# Altium PCB PCB.PcbDoc
Units mil, origin at the board's own origin, x right, y up, seen from the top; angles counter-clockwise.
Board outline 1500 x 2500 mil, 2 copper layers (Top Layer, Bottom Layer), stack 36.512 mil thick; 41 components, 27 nets, 114 pads, 89 vias.
Unrouted connection lines stored in the file: 2.
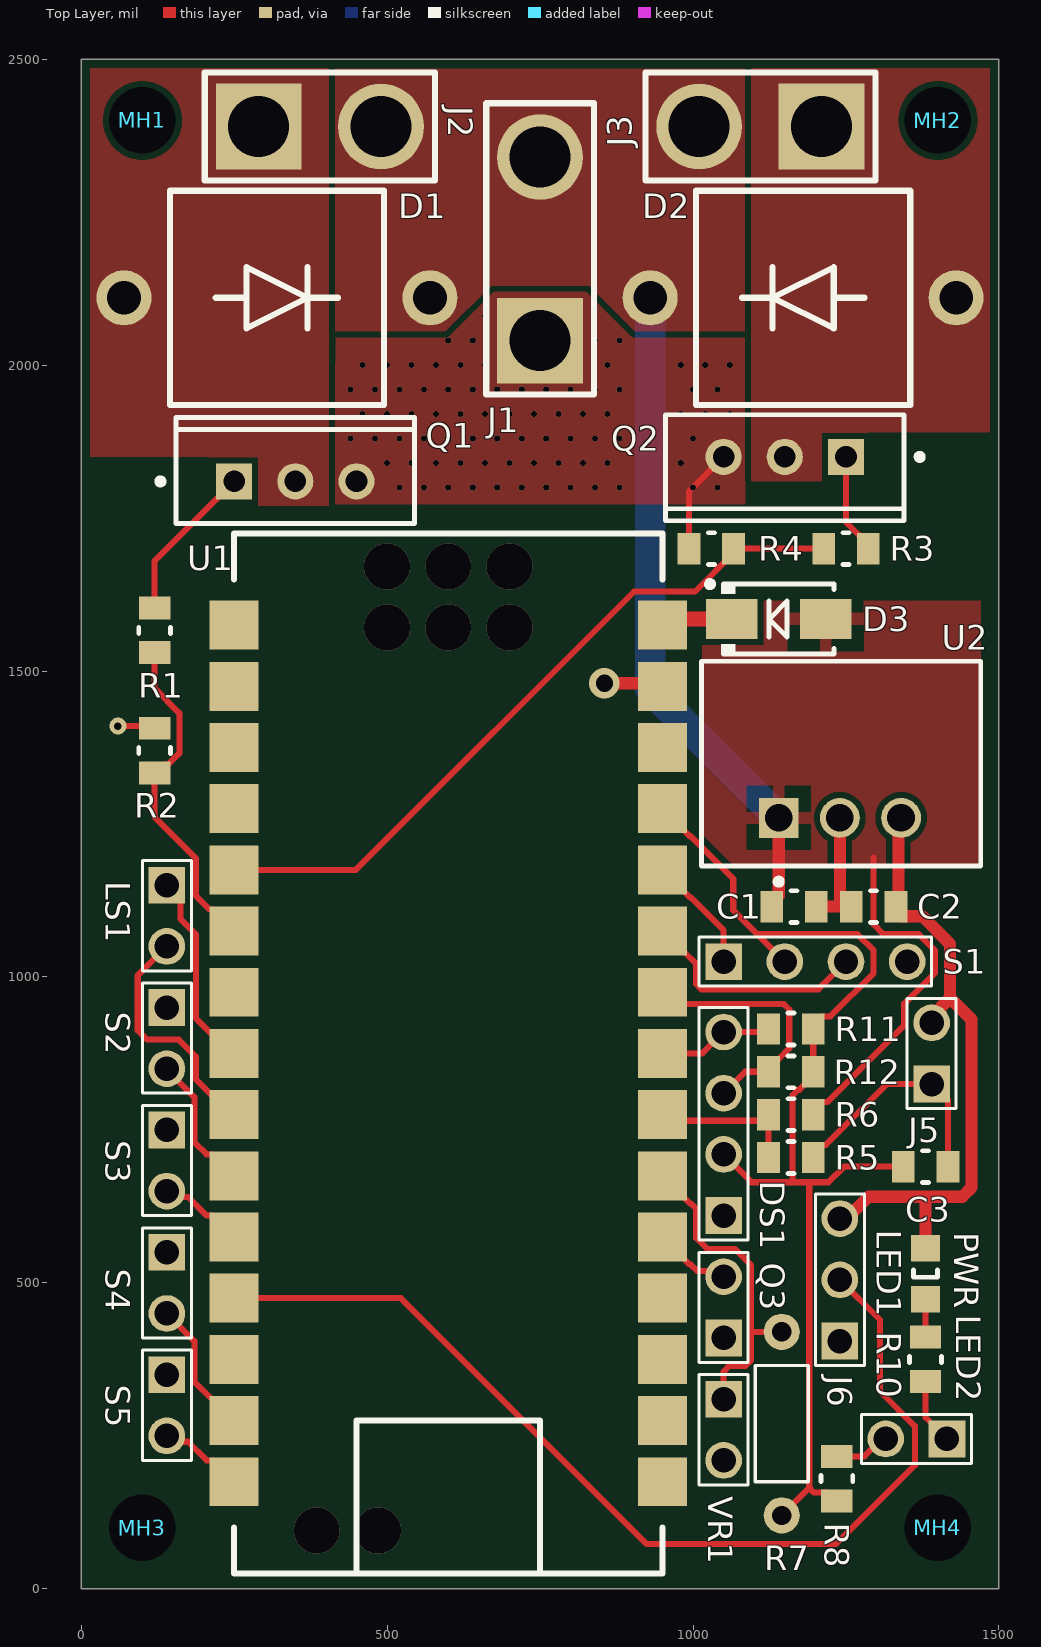
[diagram p0: Top Layer view]
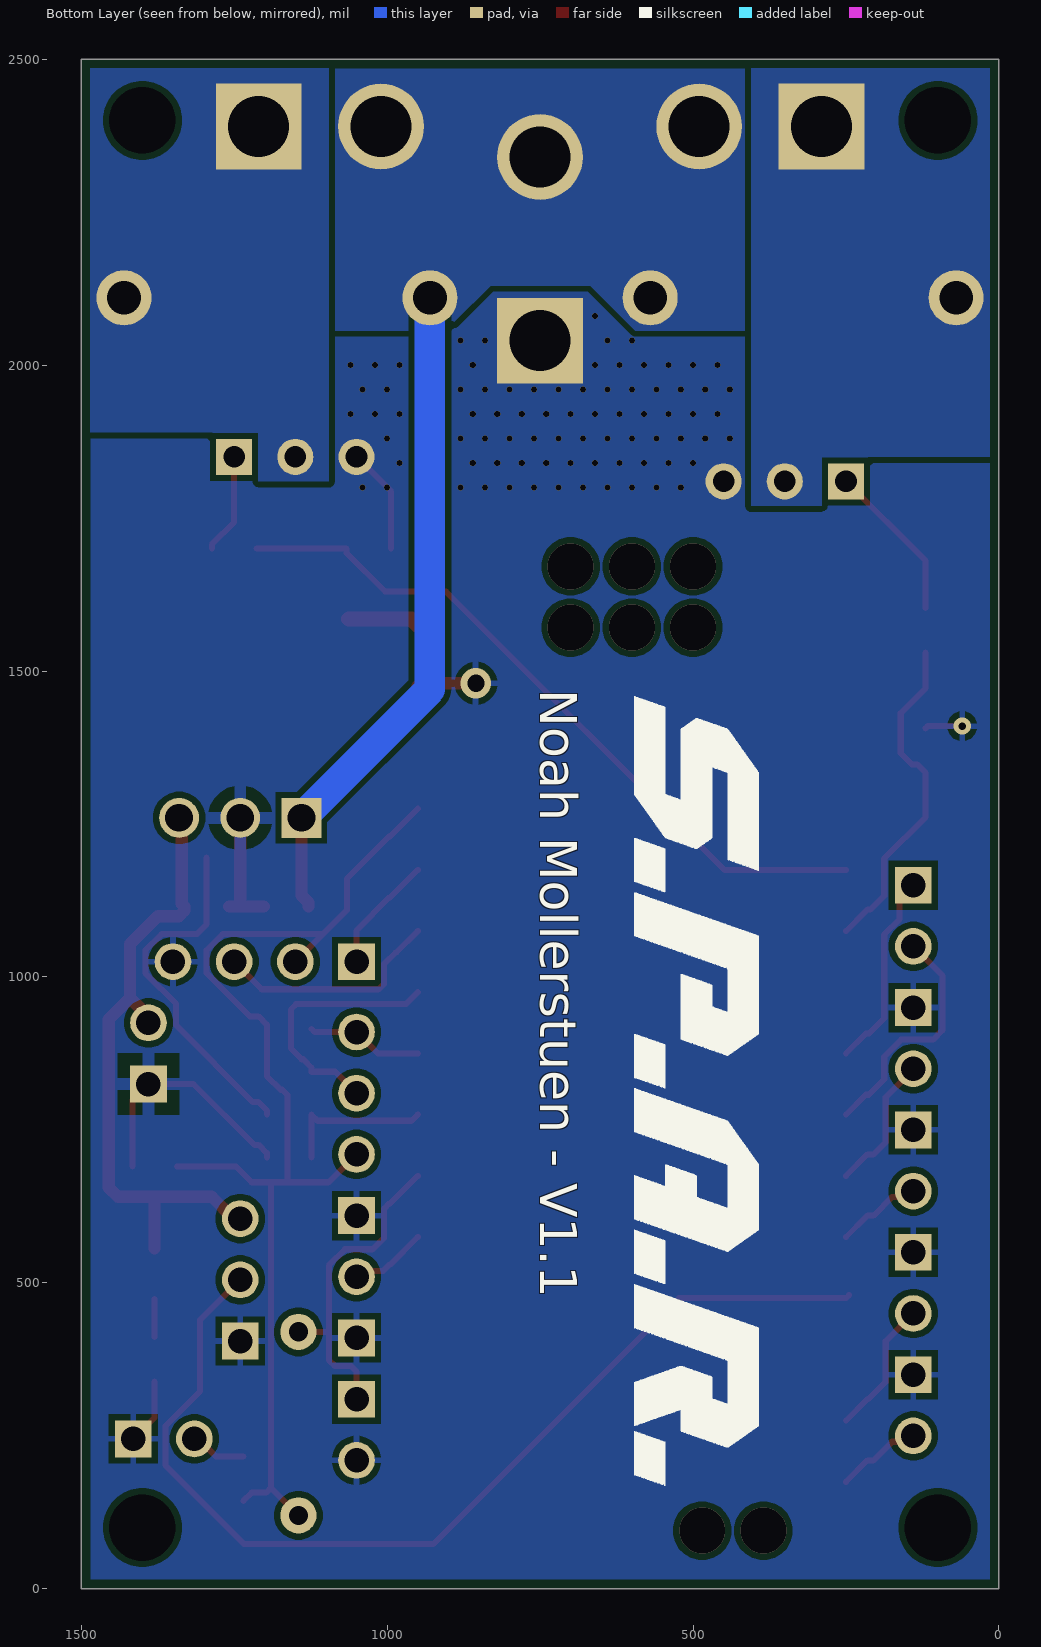
[diagram p1: Bottom Layer view, seen from below]

## Layer stack, top to bottom
Top Solder: solder mask 1, Solder Resist, Dk 3.5
Top Layer: signal copper 2.7559
Dielectric 1: core 31, Core-040, Dk 4.6
Bottom Layer: signal copper 2.7559
Bottom Solder: solder mask 1, Solder Resist, Dk 3.5

## Board outline
0,0 1500,0 1500,2500 0,2500

## Design rules (kind name [scope] priority, off if disabled: settings)
BoardOutlineClearance [All] p1: gap=15 ignorepadtopadclearanceinfootprint=FALSE except(0: Arc-SplitContinuation Track-SplitContinuation SMDPad-SplitContinuation THPad-SplitContinuation Via-SplitContinuation Fill-SplitContinuation Poly-SplitContinuation Region-SplitContinuation Text-SplitContinuation)
Clearance [All] p1: gap=10 ignorepadtopadclearanceinfootprint=TRUE except(0: Arc-Hole Track-Hole SMDPad-Hole THPad-Hole Via-Hole Fill-Hole Poly-Hole Region-Hole Text-Hole; 9.45: SMDPad-SMDPad)
HoleSize [All] p1: absolutevalues=TRUE maxlimit=250 minlimit=10 maxpercent=80.000 minpercent=20.000
MinimumAnnularRing MinimumAnnularRing_Stitching [IsStitchingVia] p1: minimumring=0
MinimumAnnularRing [All] p2: minimumring=5
PolygonConnect PolygonConnectThick [All vs (InComponent('C1') OR InComponent('C2') OR InComponent('J5') OR InComponent('U2') OR InComponent('D3'))] p1: connectstyle=Relief reliefconductorwidth=20 reliefentries=4 polygonreliefangle="90 Angle" airgapwidth=20
PolygonConnect PolygonConnectDirect [All vs (HasFootprint('J-6')OR HasFootprint('J-6-LONG') OR InComponent('U3') OR InComponent('D1') OR InComponent('D2') OR InComponent('Q1') OR InComponent('Q2')OR IsStitchingVia)] p2: connectstyle=Direct reliefconductorwidth=10 reliefentries=4 polygonreliefangle="90 Angle" airgapwidth=10
PolygonConnect [All] p3: connectstyle=Relief reliefconductorwidth=10 reliefentries=4 polygonreliefangle="90 Angle" airgapwidth=10
RoutingVias [All] p1: holewidth=28 width=50 viastyle="Through Hole" minholewidth=10 minwidth=10 maxholewidth=28 maxwidth=50
SilkToSilkClearance [All] p1: silktosilkclearance=5
SilkToSolderMaskClearance [IsPad] p1: minsilkscreentomaskgap=5 clearancetoexposedcopper=TRUE
SolderMaskExpansion [All] p1: expansion=4 istentingtop=FALSE
Width [All] p1: maxlimit=225 minlimit=10 preferedwidth=15 minimp=50.000000 maximp=50.000000 favimp=50.000000
27 further rules are at their usual default settings.

## Components (designator, comment, footprint, x,y, rotation, side; value= is the part's Value field where it differs from the comment)
C1 "10uF" chip_0805 1165,1115 r0 top
C2 "10uF" chip_0805 1295,1115 r180 top
C3 "10uF" chip_0805 1380,690 r0 top
D1 "Diode Thru-Hole 0.5\"" D-1 320,2110 r90 top
D2 "Diode Thru-Hole 0.5\"" D-1 1180,2110 r270 top
D3 "MBRA340T3G" do-214ac 1140,1585 r0 top
DS1 "I2C OLED" J-5 1050,610 r90 top
J1 "Battery" J-6-LONG 750,2040 r90 top
J2 "Motor" J-6 290,2390 r0 top
J3 "Solenoid" J-6 1210,2390 r180 top
J5 "RPi Zero W" J-3 1390,825 r90 top
J6 "Neopixel" J-4 1240,405 r90 top
LED1 "150080GS75000" 0805_A 1380,515 r90 top
LED2 "IR LED" J-3 1415,245 r180 top
LS1 "Buzzer" J-3 140,1150 r270 top
MH1 "MH-1" MH-1 100,2400 r0 top
MH2 "MH-1" MH-1 1400,2400 r0 top
MH3 "MH-1" MH-1 100,100 r0 top
MH4 "MH-1" MH-1 1400,100 r0 top
Q1 "IRLB3034PBF" INF-PG-TO-220AB 350,1810 r90 top
Q2 "IRLB3034PBF" INF-PG-TO-220AB 1150,1850 r270 top
Q3 "Phototransistor" J-3 1050,410 r90 top
R1 "1k" chip_0805 120,1566.42 r270 top
R2 "10k" chip_0805 120,1370 r270 top
R3 "1k" chip_0805 1250,1700 r180 top
R4 "10k" chip_0805 1030,1700 r0 top
R5 "10k" chip_0805 1160,705 r0 top
R6 "47k" chip_0805 1160,775 r180 top
R7 "100k" axial_0.3 1145,120 r90 top
R8 "220" chip_0805 1235,180 r90 top
R10 "100" chip_0805 1380,375 r270 top
R11 "10k" chip_0805 1160,915 r0 top
R12 "10k" chip_0805 1160,845 r0 top
S1 "Joystick" J-5 1050,1025 r0 top
S2 "1A Microswitch" J-3 140,950 r270 top
S3 "1A Microswitch" J-3 140,750 r270 top
S4 "1A Microswitch" J-3 140,550 r270 top
S5 "1A Microswitch" J-3 140,350 r270 top
U1 "Arduino Nano Every" ARDUINO_NANO 600,875 r0 top
U2 "R-78E5.0-0.5" REPO-R-78E-0.5-3_V 1240,1260 r0 top
VR1 "Pot" J-3 1050,310 r270 top

## Footprints (in the part's own frame and the unit in brackets; to place one, negate y for a bottom-side part, rotate by r counter-clockwise, add the part's x,y. Pads: shape width x height; smd on the part's side, far side on the other; paste and mask are expansions set on the pad)
0805_A [mm] "Chip LED, 2-Leads, Body 2.0x1.3mm, IPC Medium Density"
  rect 1.1x1.2 smd: 1(-1.05,0) 2(1.05,0)
  silkscreen extent -0.15,-0.5 0.15,0.5, body extent -1,-0.62 1,0.63, height 0.68
ARDUINO_NANO [mil] "Casselated pads for the Arduino Nano Every"
  rect 80x80 smd: 1(-350,700) 2(-350,600) 3(-350,500) 4(-350,400) 5(-350,300) 6(-350,200) 7(-350,100) 8(-350,0) 9(-350,-100) 10(-350,-200) 11(-350,-300) 12(-350,-400) 13(-350,-500) 14(-350,-600) 15(-350,-700) 16(350,-700) 17(350,-600) 18(350,-500) 19(350,-400) 20(350,-300) 21(350,-200) 22(350,-100) 23(350,0) 24(350,100) 25(350,200) 26(350,300) 27(350,400) 28(350,500) 29(350,600) 30(350,700)
  silkscreen extent -350,-850 350,850, body extent -350,-894 350,850, height 142
axial_0.3 [mm] "Axial leaded component, 0.3\" spacing"
  round 1.5 hole 0.8: 1(0,0) 2(7.62,0)
  silkscreen extent 1.4,-1.1 6.22,1.1, body extent -0.27,-1.15 7.87,1.14, height 2.4
chip_0805 [mm]
  rect 0.95x1.3 smd: 1(-0.925,0) 2(0.925,0)
  silkscreen extent -0.13,-0.66 0.13,0.66, body extent -1.05,-0.65 1.05,0.65, height 0.6
D-1 [mil]
  round 90 hole 55: 1(0,250) 2(0,-250)
  silkscreen extent -175,-175 175,175, body extent -175,-275 175,275, height 375
do-214ac [mm] "DO-214AC, SMA"
  rect 2.15x1.65 smd: 1(-1.95,0) 2(1.95,0)
  silkscreen extent -2.97,-1.45 2.3,1.57, body extent -2.3,-1.46 2.3,1.46, height 2.3
INF-PG-TO-220AB [mm] "FM, 3-Leads, Body 9.9x4.4mm, Pitch 2.54mm"
  rect 1.5x1.5 hole 0.9: 1(0,2.54)
  round 1.5 hole 0.9: 2(0,0) 3(0,-2.54)
  silkscreen extent -1.75,-4.95 2.65,5.72, body extent -1.75,-4.95 2.65,4.95, height 20.2
J-3 [mil] "2 pin Thru-Hole AWG 24"
  rect 60x60 hole 40: 1(0,0)
  round 60 hole 40: 2(100,0)
  silkscreen extent -40,-40 140,40, body extent -50,-50 150,50, height 350
J-4 [mil] "3 pin Thru-Hole AWG 24"
  rect 60x60 hole 40: 1(0,0)
  round 60 hole 40: 2(100,0) 3(200,0)
  silkscreen extent -40,-40 240,40, body extent -50,-50 250,50, height 350
J-5 [mil] "4 pin Thru-Hole AWG 24"
  rect 60x60 hole 40: 1(0,0)
  round 60 hole 40: 2(100,0) 3(200,0) 4(300,0)
  silkscreen extent -40,-40 340,40, body extent -50,-50 350,50, height 350
J-6 [mil] "2 pin Thru-Hole AWG 16"
  rect 140x140 hole 100: 1(0,0)
  round 140 hole 100: 2(200,0)
  silkscreen extent -88,-88 288,88
J-6-LONG [mil] "2 pin Thru-Hole AWG 16 Larger Spacing"
  rect 140x140 hole 100: 1(0,0)
  round 140 hole 100: 2(300,0)
  silkscreen extent -88,-88 388,88
MH-1 [mm] "Mounting Hole M2.5"
  round 0 hole 2.75: 1(0,0)
REPO-R-78E-0.5-3_V [mm] "THD, 3-Leads, Body 11.6x8.5mm, Pitch 2.54mm"
  rect 1.65x1.65 hole 1.15: 1(-2.54,0)
  round 1.65 hole 1.15: 2(0,0) 3(2.54,0)
  silkscreen extent -5.75,-2.77 5.85,6.5, body extent -5.75,-2 5.85,6.5, height 10.4

## Part data
C1 C2 C3: library part CAP-00131, "CAP, 10uF, 10%, 25V, X7R, 0805", Manufacturer=Murata, Manufacturer PN=GRM21BR71A106KA73L, Tolerance=10%, Voltage Rating=25V, Capacitance=10uF, Part Number=CAP-00131, Type=X7R
D1 D2: library part D-1, Supplier Part Number 1=625-5KP60A-E3, Supplier 1=Mouser
D3: library part DIO-00005, "Dio Shtky, 3A, 0.45V, 40V, SMA", Current Rating=3A, Forward Voltage=450mV, Manufacturer="ON Semi", Reverse Breakdown Voltage=40V, Supplier Part Number 1=CDBA340-G, Manufacturer PN=MBRA340T3G, Part Number=DIO-00005, Supplier 1="Arrow Electronics", Type=Schottky
DS1 S1: library part J-5, "4 pin Thru-Hole AWG 24"
J1: library part J-6-LONG, "2 pin Thru-Hole AWG 16 Larger Spacing"
J2 J3: library part J-6, "2 pin Thru-Hole AWG 16"
J5 LED2 LS1 Q3 VR1: library part J-3, "2 pin Thru-Hole AWG 24"
J6: library part J-4, "3 pin Thru-Hole AWG 24"
LED1: library part CMP-1426-00007-1, "SMD mono-color Chip LED, WL-SMCW, Green", Color=Green, Manufacturer="Wuerth Elektronik", ComponentLink1Description="Manufacturer URL", ComponentLink1URL=http://www.we-online.com, ComponentLink2Description=Datasheet, ComponentLink2URL=http://katalog.we-online.com/led/datasheet/150080GS75000.pdf, PackageReference=0805_A, PartNumber=150080GS75000
MH1 MH2 MH3 MH4: "Mouting Hole M2.5"
Q1 Q2: library part CMP-2000-04998-1, "Mosfet N-Channel, 40 V, 195 A, -55 to 175 degC, 3-Pin TO-220AB, RoHS, Tube", Forward Diode Voltage=1.3V, Manufacturer="International Rectifier", Maximum Continuous Drain Current=343A, Maximum Drain Source Resistance=2mΩ, Maximum Drain Source Voltage=40V, Maximum Gate Source Voltage=±20V, Maximum Operating Temperature=+175degC, Maximum Power Dissipation=375W, Minimum Operating Temperature=-55degC, Operating Temperature Range=-55to+175degC, Package Description="3-Pin Plastic (Green) Transistor Single Outline Package, 9.9 x 9.2 mm Body, 2.54 mm Pitch", Package Reference=PG-TO-220AB, Package Type=TO-220AB, Package Version=Feb-04, Typical Input Capacitance @ Vds=10315pF@25V, Category=PowerMOSFET, Channel Mode=Enhancement, Channel Type=N, Configuration=Single, Datasheet URL=https://datasheet.ciiva.com/26325/161162-da-01-en-mosfet-irlb3034pbf-to220ab-ir-26325354.pdf, Datasheet Version=Jan-09, Dimensions=10.54x4.69x15.24mm, Forward Transconductance=286S, Height=15.24mm, Length=10.54mm, Manufacturer URL=http://internationalrectifier.com/, Mounting Type=ThroughHole, Number of Elements per Chip=1, Package URL=http://www.infineon.com/dgdl/bts110.pdf?folderId=db3a304412b407950112b43583c16310&fileId=db3a304412b407950112b43584326311&sId=db3a30443e3c704d013e4eb6657a2604, Pin Count=3, Series=HEXFETSeries, Typical Gate Charge @ Vgs=54nC@4.5V, Typical Turn On Delay Time=65ns, Typical TurnOff Delay Time=97ns, Width=4.69mm
R1 R3: library part RES-00361, "RES SMD 1K OHM 1% 1/8W 0805", Manufacturer="Rohm Semiconductor", Manufacturer PN=KTR10EZPF1001, Power Rating=0.125W, Tolerance=1%, Part Number=RES-00361, Resistance=1k
R2 R4 R5 R11 R12: library part RES-00307, "RES SMD 10K OHM 1% 1/8W 0805", Manufacturer="Rohm Semiconductor", Manufacturer PN=KTR10EZPF1002, Power Rating=0.125W, Tolerance=1%, Part Number=RES-00307, Resistance=10k
R6: library part RES-00493, "RES SMD 47K OHM 1% 1/8W 0805", Manufacturer="Rohm Semiconductor", Manufacturer PN=KTR10EZPF4702, Power Rating=0.125W, Tolerance=1%, Part Number=RES-00493, Resistance=47k
R7: library part RES-00609, "RES THT 100K OHM 1% 1/4W 0.3\" AXIAL", Power Rating=0.25W, Tolerance=1%, Part Number=RES-00609, Resistance=100k
R8: library part RES-00202, "RES SMD 220 OHM 1% 1/8W 0805", Manufacturer="Rohm Semiconductor", Manufacturer PN=KTR10EZPF2200, Power Rating=0.125W, Tolerance=1%, Part Number=RES-00202, Resistance=220
R10: library part RES-00179, "RES SMD 100 OHM 1% 1/8W 0805", Manufacturer="Rohm Semiconductor", Manufacturer PN=KTR10EZPF1000, Power Rating=0.125W, Tolerance=1%, Part Number=RES-00179, Resistance=100
S2 S3 S4 S5: library part S-1
U1: library part U-1, "Arduino Nano Every, SMD Footprint"
U2: library part CMP-2000-06922-2, "DC/DC-Converter, 5 V Single Output, 500 mA, -40 to 85 degC, 3-Pin THD, RoHS, Tube", Current - Output (Max)=500mA, Manufacturer="Recom Power", Operating Temperature=-40°C~85°C, Package Description="3-Pin Through Hole Device, Body 11.6 x 8.5 mm, Pitch 2.54 mm", Package Reference="SIP Module", Package Version="Rev. 0", Datasheet URL=http://www.recom-power.com/pdf/Innoline/R-78Exx-0.5.pdf, Datasheet Version=01/2017, Efficiency=92%, Manufacturer URL=http://www.recom-power.com/us/americas/home.html, Mounting Technology=ThroughHole, Number of Outputs=1, Packaging=Tube, VIN Max=28V, VIN Min=7V, VOUT=5V

## Via types
v1: diameter 10, hole 10, Top Layer to Bottom Layer, tented top, 79 vias
v2: diameter 75, hole 75, Top Layer to Bottom Layer, 8 vias
v3: diameter 50, hole 28, Top Layer to Bottom Layer, 1 vias
v4: diameter 28, hole 12, Top Layer to Bottom Layer, 1 vias

## Nets (pads, with @x,y where several pads share a name; then routed paths per layer and width w, separated by ;. In a path a pad name is that pad's centre, name@x,y a point inside that pad or via, vN(x,y) a via of type N, cw(c..) or ccw(c..) an arc to the next point about the centre after c; other vN are vias at no path point)
+5: C3.1 DS1.2 R7.1 R8.1 R11.2 R12.2 S1.2 U1.27 | length 1919.9
  Top Layer w10: U1.27 995,1230 996.21,1230 1065.71,1160.5 1065.71,1109.29 1105,1070 ; DS1.2 1095.59,664.41 1158.46,664.41 ; R7.1 1189.9,164.9 ; S1.2 1105,1070 ; R8.1 1221.3,157.28 1197.51,157.28 1189.9,164.9 ; C3.1 1246.92,690 1221.33,664.41 1189.9,664.41 ; 1105,1070 1268.64,1070 1295,1043.64 1295,1006.36 1224.23,935.59 1210.12,935.59 1196.42,921.89 R11.2 R12.2 1196.42,838.11 1173.9,815.59 1171.5,815.59 1162.72,806.8 1162.72,668.66 1158.46,664.41 ; 1158.46,664.41 1189.9,664.41 ; 1189.9,164.9 1189.9,664.41
A1: Q3.2 U1.20 | length 126.9
  Top Layer w10: U1.20 995,530 996.21,530 1006.65,519.57 1040.43,519.57 Q3.2
A2: R7.2 U1.21 VR1.1 | length 536
  Top Layer w10: U1.21 995,630 996.21,630 1005,621.21 1005,573.79 1023.79,555 1068.64,555 1095,528.64 1095,420 ; VR1.1 1050,355 1059.39,364.39 1085.61,364.39 1095,373.79 1095,420 ; R7.2 1095,420
A3: R5.1 R6.2 U1.22 | length 251.9
  Top Layer w10: U1.22 960,765 1113.58,765 R6.2 R5.1
A6: S1.3 U1.25 | length 377
  Top Layer w10: U1.25 985,1040 986.21,1040 1005,1021.21 1005,988.79 1013.79,980 1205,980 S1.3
A7: S1.1 U1.26 | length 192.1
  Top Layer w10: U1.26 995,1130 996.21,1130 1050,1076.21 S1.1
D2: R3.2 R4.2 U1.5 | length 1185.1
  Top Layer w10: U1.5 448.79,1175 903.79,1630 1003.31,1630 1066.42,1693.11 R4.2 R3.2
D3: R1.2 R2.2 U1.6 | length 550.3
  Top Layer w10: R1.2 120,1471.92 160.59,1431.33 160.59,1365.59 142.28,1347.28 133.7,1347.28 R2.2 120,1261.32 187.5,1193.82 187.5,1132.75 210.25,1110 215,1110 U1.6
D5: LS1.1 U1.8 | length 323.3
  Top Layer w10: LS1.1 162.5,1127.5 162.5,1094.68 187.5,1069.68 187.5,932.75 212.75,907.5 217.5,907.5 U1.8
D6: LS1.2 U1.9 | length 393.1
  Top Layer w10: LS1.2 92.5,1002.5 92.5,912.75 107.75,897.5 159.68,897.5 187.5,869.68 187.5,832.75 212.75,807.5 217.5,807.5 U1.9
D7: S2.2 U1.10 | length 226.4
  Top Layer w10: S2.2 140,848.43 185,803.43 185,730 205,710 215,710 U1.10
D8: S3.2 U1.11 | length 141.1
  Top Layer w10: S3.2 149.57,640.43 174.57,640.43 205,610 215,610 U1.11
D9: J6.2 U1.12 | length 1693.3
  Top Layer w10: U1.12@245,480 U1.12 522.48,475 924.5,72.97 1233.43,72.97 1362.5,202.04 1362.5,265.68 1305.56,322.63 1305.56,439.44 J6.2
D11: S4.2 U1.14 | length 221.3
  Top Layer w10: S4.2 185,405 185,338.79 213.79,310 215,310 U1.14
D12: S5.2 U1.15 | length 141.1
  Top Layer w10: S5.2 149.57,240.43 174.57,240.43 205,210 215,210 U1.15
GND: C1.2 C2.2 C3.2 DS1.1 J1.1 J5.1 J6.1 LED2.1 Q1.3 Q2.3 Q3.1 R2.1 R4.1 R5.2 R10.2 S1.4 S2.1 S3.1 S4.1 S5.1 U1.29 U2.2 VR1.2 | length 1035.4
  Top Layer w10: v4(60,1410) 116.42,1410 R2.1 ; R4.1 993.58,1793.58 Q2.3 ; R5.2 1196.42,711.89 1210.12,725.59 1217.01,725.59 1316.42,825 J5.1 1416.42,798.58 C3.2 ; R10.2 1380,280 LED2.1
  Top Layer w20: v3(855,1480) 945,1480 U1.29 ; C1.2 C2.2@1240,1115 ; U2.2 C2.2@1240,1115 ; C2.2 C2.2@1240,1115
  other v1: 520,1800 560,1800 600,1800 640,1800 680,1800 720,1800 760,1800 800,1800 840,1800 880,1800 1000,1800 1040,1800 500,1840 540,1840 580,1840 620,1840 660,1840 700,1840 740,1840 780,1840 820,1840 860,1840 980,1840 440,1880 480,1880 520,1880 560,1880 600,1880 640,1880 680,1880 720,1880 760,1880 800,1880 840,1880 880,1880 1000,1880 460,1920 500,1920 540,1920 580,1920 620,1920 660,1920 700,1920 740,1920 780,1920 820,1920 860,1920 980,1920 1020,1920 1060,1920 440,1960 480,1960 520,1960 560,1960 600,1960 640,1960 680,1960 720,1960 760,1960 800,1960 840,1960 880,1960 1000,1960 1040,1960 460,2000 500,2000 540,2000 580,2000 620,2000 660,2000 860,2000 980,2000 1020,2000 1060,2000 600,2040 640,2040 840,2040 880,2040 660,2080
NetC2_1: C2.1 J5.2 J6.3 LED1.2 U2.3 | length 1053
  Top Layer w20: J6.3 1250.82,605 1286.76,640.94 1380,640.94 ; U2.3 1335.71,1255.71 1335.71,1119.29 C2.1 1331.42,1108.11 1340.12,1099.41 1374.59,1099.41 1420,1053.99 1420,965.82 ; LED1.2 1380,640.94 ; J5.2 1390,935.82 1420,965.82 ; 1380,640.94 1439.93,640.94 1455.12,656.13 1455.12,930.71 1420,965.82
NetD1_1: D1.1 J2.1 Q1.2
NetD2_1: D2.1 J3.1 Q2.2
NetD3_1: D3.1 U1.30 | length 117.4
  Top Layer w25: U1.30 960,1585 D3.1
NetLED1_1: LED1.1 R10.1 | length 62.2
  Top Layer w10: R10.1 LED1.1
NetLED2_2: LED2.2 R8.2 | length 91.8
  Top Layer w10: R8.2 1279.94,216.42 1308.53,245 LED2.2
NetQ1_1: Q1.1 R1.1 | length 261
  Top Layer w10: R1.1 120,1680 Q1.1
NetQ2_1: Q2.1 R3.1 | length 165.1
  Top Layer w10: Q2.1 1250,1743.31 1286.42,1706.89 R3.1
SCL: DS1.3 R12.1 U1.24 | length 424.2
  Top Layer w10: U1.24 969.41,955.59 1148.5,955.59 1157.28,946.8 1157.28,883.2 1139.68,865.59 1137.28,865.59 1123.58,851.89 R12.1 1085,845 DS1.3
SDA: DS1.4 R11.1 U1.23 | length 190.2
  Top Layer w10: U1.23 1015,875 DS1.4 1118.58,910 R11.1
VCC: C1.1 D1.2 D2.2 D3.2 J1.2 J2.2 J3.2 R6.1 U2.1 | length 1669.6
  Top Layer w10: R6.1 1196.42,781.89 1210.12,795.59 1219.4,795.59 1345,921.19 1345,956.36 1395,1006.36 1395,1043.64 1368.64,1070 1310.91,1070 1295,1085.91 1295,1195
  Top Layer w20: C1.1 1128.58,1121.89 1140,1133.31 U2.1
  Bottom Layer w50: D2.2 930,1470 U2.1
pads on no net: MH1.1 MH2.1 MH3.1 MH4.1 U1.1 U1.2 U1.3 U1.4 U1.7 U1.13 U1.16 U1.17 U1.18 U1.19 U1.28
copper on no net:
  other v2: 385,95 485,95 500,1571 600,1571 700,1571 500,1671 600,1671 700,1671

## Polygon pours and split planes (outlines as drawn)
GND on Bottom Layer "GND_L02_P025" (solid, pour order 25): 0,2500 1500,2500 1500,0 0,0
VCC on Bottom Layer "VCC_L02_P024" (solid, pour order 24): 904.18,2056.5 830.68,2130 667.68,2130 594.18,2056.5 379.18,2056.5 379.18,2291.5 379.18,2501.5 1119.18,2501.5 1119.18,2291.5 1119.18,2056.5
NetD2_1 on Bottom Layer "NETD2_1_L02_P023" (solid, pour order 23): 1290,1810 1290,1849.05 1289.53,1849.53 1290,1890 1485,1890 1485,2485 1095,2485 1095,1810
NetD1_1 on Bottom Layer "NETD1_1_L02_P022" (solid, pour order 22): 210,1770 210,1849.05 210.47,1849.53 210,1850 15,1850 15,2485 405,2485 405,1770
GND on Top Layer "GND_L01_P026" (solid, pour order 26): 413.36,1772.5 1085,1772.5 1085,2120 416.67,2120
VCC on Top Layer "VCC_L01_P021" (solid, pour order 21): 905,2055 830,2130 670,2130 595,2055 380,2055 380,2290 380,2500 1120,2500 1120,2290 1120,2055
NetD2_1 on Top Layer "NETD2_1_L01_P020" (solid, pour order 20): 1290,1810 1290,1849.05 1289.53,1849.53 1290,1890 1485,1890 1485,2485 1095,2485 1095,1810
NetD1_1 on Top Layer "NETD1_1_L01_P019" (solid, pour order 19): 210,1770 210,1849.05 210.47,1849.53 210,1850 15,1850 15,2485 405,2485 405,1770
VCC on Top Layer "VCC_L01_P027" (solid, pour order 27): 1470,1180 1015,1180 1015,1615 1470,1615

## Silkscreen, mask and mechanical layers (free items; w line width, h text height)
Top Overlay:
  text "PWR" at 1427,583 h40 r270
Bottom Overlay:
  drawing of 8 lines, arcs and shapes, not listed
  text "Noah Mollerstuen - V1.1" at 750,1470 h60 r90
Drill Drawing:
  circle w10: c4960.62,3520.83 r20
  circle w10: c4960.62,3520.83 r33.33
  circle w10: c4960.62,2620.83 r33.33
  lines w10: 4927.29,2004.17 4943.96,2004.17 4943.96,1987.5 4977.29,1987.5 4977.29,2004.17 4993.96,2004.17 4993.96,2037.5 4977.29,2037.5 4977.29,2054.17 4943.96,2054.17 4943.96,2037.5 4927.29,2037.5 4927.29,2004.17 ; 4927.29,2204.17 4993.96,2204.17 4960.62,2137.5 4927.29,2204.17 ; 4927.29,2304.17 4943.96,2304.17 4960.62,2287.5 4977.29,2304.17 4993.96,2304.17 4977.29,2320.83 4993.96,2337.5 4977.29,2337.5 4960.62,2354.17 4943.96,2337.5 4927.29,2337.5 4943.96,2320.83 4927.29,2304.17 ; 4927.29,2504.17 4993.96,2504.17 4960.62,2437.5 4927.29,2504.17 ; 4927.29,2770.83 4960.62,2737.5 4993.96,2770.83 4960.62,2804.17 4927.29,2770.83 ; 4927.29,2887.5 4960.62,2904.17 4993.96,2887.5 4977.29,2920.83 4993.96,2954.17 4960.62,2937.5 4927.29,2954.17 4943.96,2920.83 4927.29,2887.5 ; 4927.29,3037.5 4993.96,3037.5 4993.96,3104.17 4927.29,3104.17 4927.29,3037.5 ; 4927.29,3204.17 4943.96,3204.17 4960.62,3187.5 4977.29,3204.17 4993.96,3204.17 4977.29,3220.83 4993.96,3237.5 4977.29,3237.5 4960.62,3254.17 4943.96,3237.5 4927.29,3237.5 4943.96,3220.83 4927.29,3204.17 ; 4927.29,3337.5 4993.96,3337.5 4993.96,3404.17 4927.29,3404.17 4927.29,3337.5 ; 4940.62,2190.83 4980.62,2190.83 4960.62,2150.83 4940.62,2190.83 ; 4940.62,2310.83 4950.62,2310.83 4960.62,2300.83 4970.62,2310.83 4980.62,2310.83 4970.62,2320.83 4980.62,2330.83 4970.62,2330.83 4960.62,2340.83 4950.62,2330.83 4940.62,2330.83 4950.62,2320.83 4940.62,2310.83 ; 4940.62,3350.83 4980.62,3350.83 4980.62,3390.83 4940.62,3390.83 4940.62,3350.83
  lines w15: 4867.5,1942.5 15578.52,1942.5 ; 4867.5,3592.5 15578.52,3592.5 ; 5418.38,1792.5 5418.38,3742.5 ; 6008.22,1792.5 6008.22,3742.5 ; 7157.88,1792.5 7157.88,3742.5 ; 7663.76,1792.5 7663.76,3742.5 ; 8397.56,1792.5 8397.56,3742.5 ; 9897.11,1792.5 9897.11,3742.5 ; 10486.96,1792.5 10486.96,3742.5 ; 11232.76,1792.5 11232.76,3742.5 ; 12012.54,1792.5 12012.54,3742.5 ; 12866.31,1792.5 12866.31,3742.5 ; 14199.91,1792.5 14199.91,3742.5 ; 4867.5,1792.5 15578.52,1792.5 15578.52,3742.5 4867.5,3742.5 4867.5,1792.5
  text "Symbol" at 4957.5,3637.5 h72
  text "Count" at 5463.38,3637.5 h72
  text "Hole Size" at 6053.22,3637.5 h72
  text "Plated" at 7202.88,3637.5 h72
  text "Hole Type" at 7708.76,3637.5 h72
  text "Drill Layer Pair" at 8442.56,3637.5 h72
  text "Via/Pad" at 9942.11,3637.5 h72
  text "Pad Shape" at 10531.96,3637.5 h72
  text "Template" at 11277.76,3637.5 h72
  text "Description" at 12057.54,3637.5 h72
  text "Hole Tolerance (+)" at 12911.31,3637.5 h72
  text "Hole Tolerance (-)" at 14244.91,3637.5 h72
  text "1" at 5463.38,3487.5 h60
  text "12.00mil (0.305mm)" at 6053.22,3487.5 h60
  text "PTH" at 7202.88,3487.5 h60
  text "Round" at 7708.76,3487.5 h60
  text "Top Layer - Bottom Layer" at 8442.56,3487.5 h60
  text "Via" at 9942.11,3487.5 h60
  text "Rounded" at 10531.96,3487.5 h60
  text "v71h30" at 11277.76,3487.5 h60
  text "1" at 5463.38,3337.5 h60
  text "28.00mil (0.711mm)" at 6053.22,3337.5 h60
  text "PTH" at 7202.88,3337.5 h60
  text "Round" at 7708.76,3337.5 h60
  text "Top Layer - Bottom Layer" at 8442.56,3337.5 h60
  text "Via" at 9942.11,3337.5 h60
  text "Rounded" at 10531.96,3337.5 h60
  text "v127h71" at 11277.76,3337.5 h60
  text "2" at 5463.38,3187.5 h60
  text "31.50mil (0.800mm)" at 6053.22,3187.5 h60
  text "PTH" at 7202.88,3187.5 h60
  text "Round" at 7708.76,3187.5 h60
  text "Top Layer - Bottom Layer" at 8442.56,3187.5 h60
  text "Pad" at 9942.11,3187.5 h60
  text "Rounded" at 10531.96,3187.5 h60
  text "c150h80" at 11277.76,3187.5 h60
  text "3" at 5463.38,3037.5 h60
  text "45.28mil (1.150mm)" at 6053.22,3037.5 h60
  text "PTH" at 7202.88,3037.5 h60
  text "Round" at 7708.76,3037.5 h60
  text "Top Layer - Bottom Layer" at 8442.56,3037.5 h60
  text "Pad" at 9942.11,3037.5 h60
  text "(Mixed)" at 10531.96,3037.5 h60
  text "(Mixed)" at 11277.76,3037.5 h60
  text "4" at 5463.38,2887.5 h60
  text "55.00mil (1.397mm)" at 6053.22,2887.5 h60
  text "PTH" at 7202.88,2887.5 h60
  text "Round" at 7708.76,2887.5 h60
  text "Top Layer - Bottom Layer" at 8442.56,2887.5 h60
  text "Pad" at 9942.11,2887.5 h60
  text "Rounded" at 10531.96,2887.5 h60
  text "c229h140" at 11277.76,2887.5 h60
  text "4" at 5463.38,2737.5 h60
  text "108.27mil (2.750mm)" at 6053.22,2737.5 h60
  text "PTH" at 7202.88,2737.5 h60
  text "Round" at 7708.76,2737.5 h60
  text "Top Layer - Bottom Layer" at 8442.56,2737.5 h60
  text "Pad" at 9942.11,2737.5 h60
  text "Rounded" at 10531.96,2737.5 h60
  text "c0h275" at 11277.76,2737.5 h60
  text "6" at 5463.38,2587.5 h60
  text "35.43mil (0.900mm)" at 6053.22,2587.5 h60
  text "PTH" at 7202.88,2587.5 h60
  text "Round" at 7708.76,2587.5 h60
  text "Top Layer - Bottom Layer" at 8442.56,2587.5 h60
  text "Pad" at 9942.11,2587.5 h60
  text "(Mixed)" at 10531.96,2587.5 h60
  text "(Mixed)" at 11277.76,2587.5 h60
  text "6" at 5463.38,2437.5 h60
  text "100.00mil (2.540mm)" at 6053.22,2437.5 h60
  text "PTH" at 7202.88,2437.5 h60
  text "Round" at 7708.76,2437.5 h60
  text "Top Layer - Bottom Layer" at 8442.56,2437.5 h60
  text "Pad" at 9942.11,2437.5 h60
  text "(Mixed)" at 10531.96,2437.5 h60
  text "(Mixed)" at 11277.76,2437.5 h60
  text "8" at 5463.38,2287.5 h60
  text "75.00mil (1.905mm)" at 6053.22,2287.5 h60
  text "PTH" at 7202.88,2287.5 h60
  text "Round" at 7708.76,2287.5 h60
  text "Top Layer - Bottom Layer" at 8442.56,2287.5 h60
  text "Via" at 9942.11,2287.5 h60
  text "Rounded" at 10531.96,2287.5 h60
  text "v190h190m190" at 11277.76,2287.5 h60
  text "29" at 5463.38,2137.5 h60
  text "40.00mil (1.016mm)" at 6053.22,2137.5 h60
  text "PTH" at 7202.88,2137.5 h60
  text "Round" at 7708.76,2137.5 h60
  text "Top Layer - Bottom Layer" at 8442.56,2137.5 h60
  text "Pad" at 9942.11,2137.5 h60
  text "(Mixed)" at 10531.96,2137.5 h60
  text "(Mixed)" at 11277.76,2137.5 h60
  text "79" at 5463.38,1987.5 h60
  text "10.00mil (0.254mm)" at 6053.22,1987.5 h60
  text "PTH" at 7202.88,1987.5 h60
  text "Round" at 7708.76,1987.5 h60
  text "Top Layer - Bottom Layer" at 8442.56,1987.5 h60
  text "Via" at 9942.11,1987.5 h60
  text "Rounded" at 10531.96,1987.5 h60
  text "v25h25m0" at 11277.76,1987.5 h60
  text "143 Total" at 5463.38,1837.5 h60